# Altium PCB High_v4.PcbDoc
Units mm, origin at the board's own origin, x right, y up, seen from the top; angles counter-clockwise.
Board outline 56.79 x 56.79 mm, 2 copper layers (Top Layer, Bottom Layer); 36 components, 47 nets, 132 pads, 28 vias.
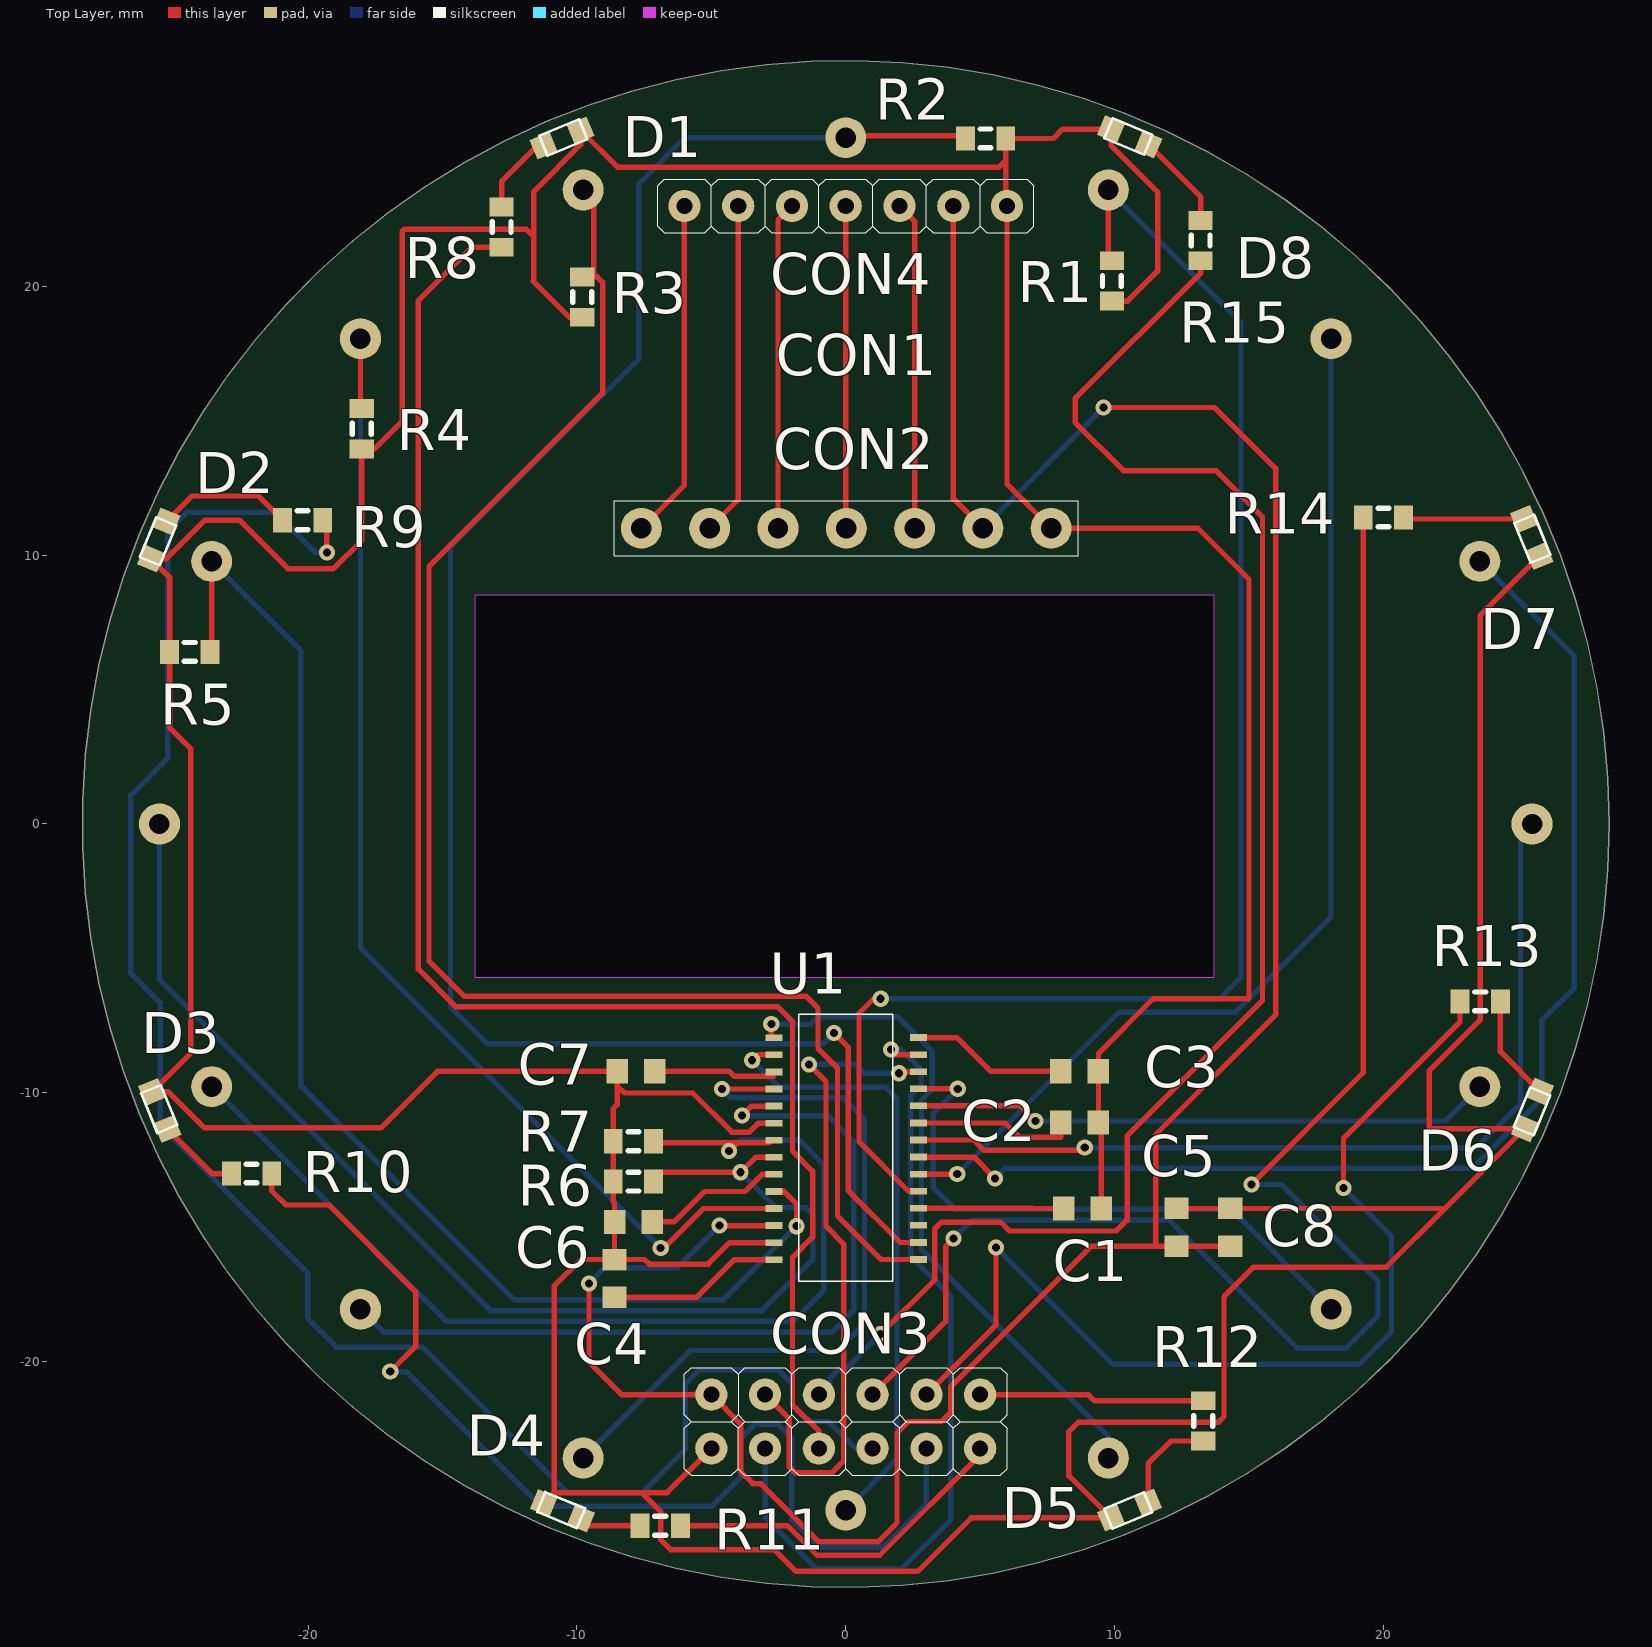
[diagram p0: Top Layer view]
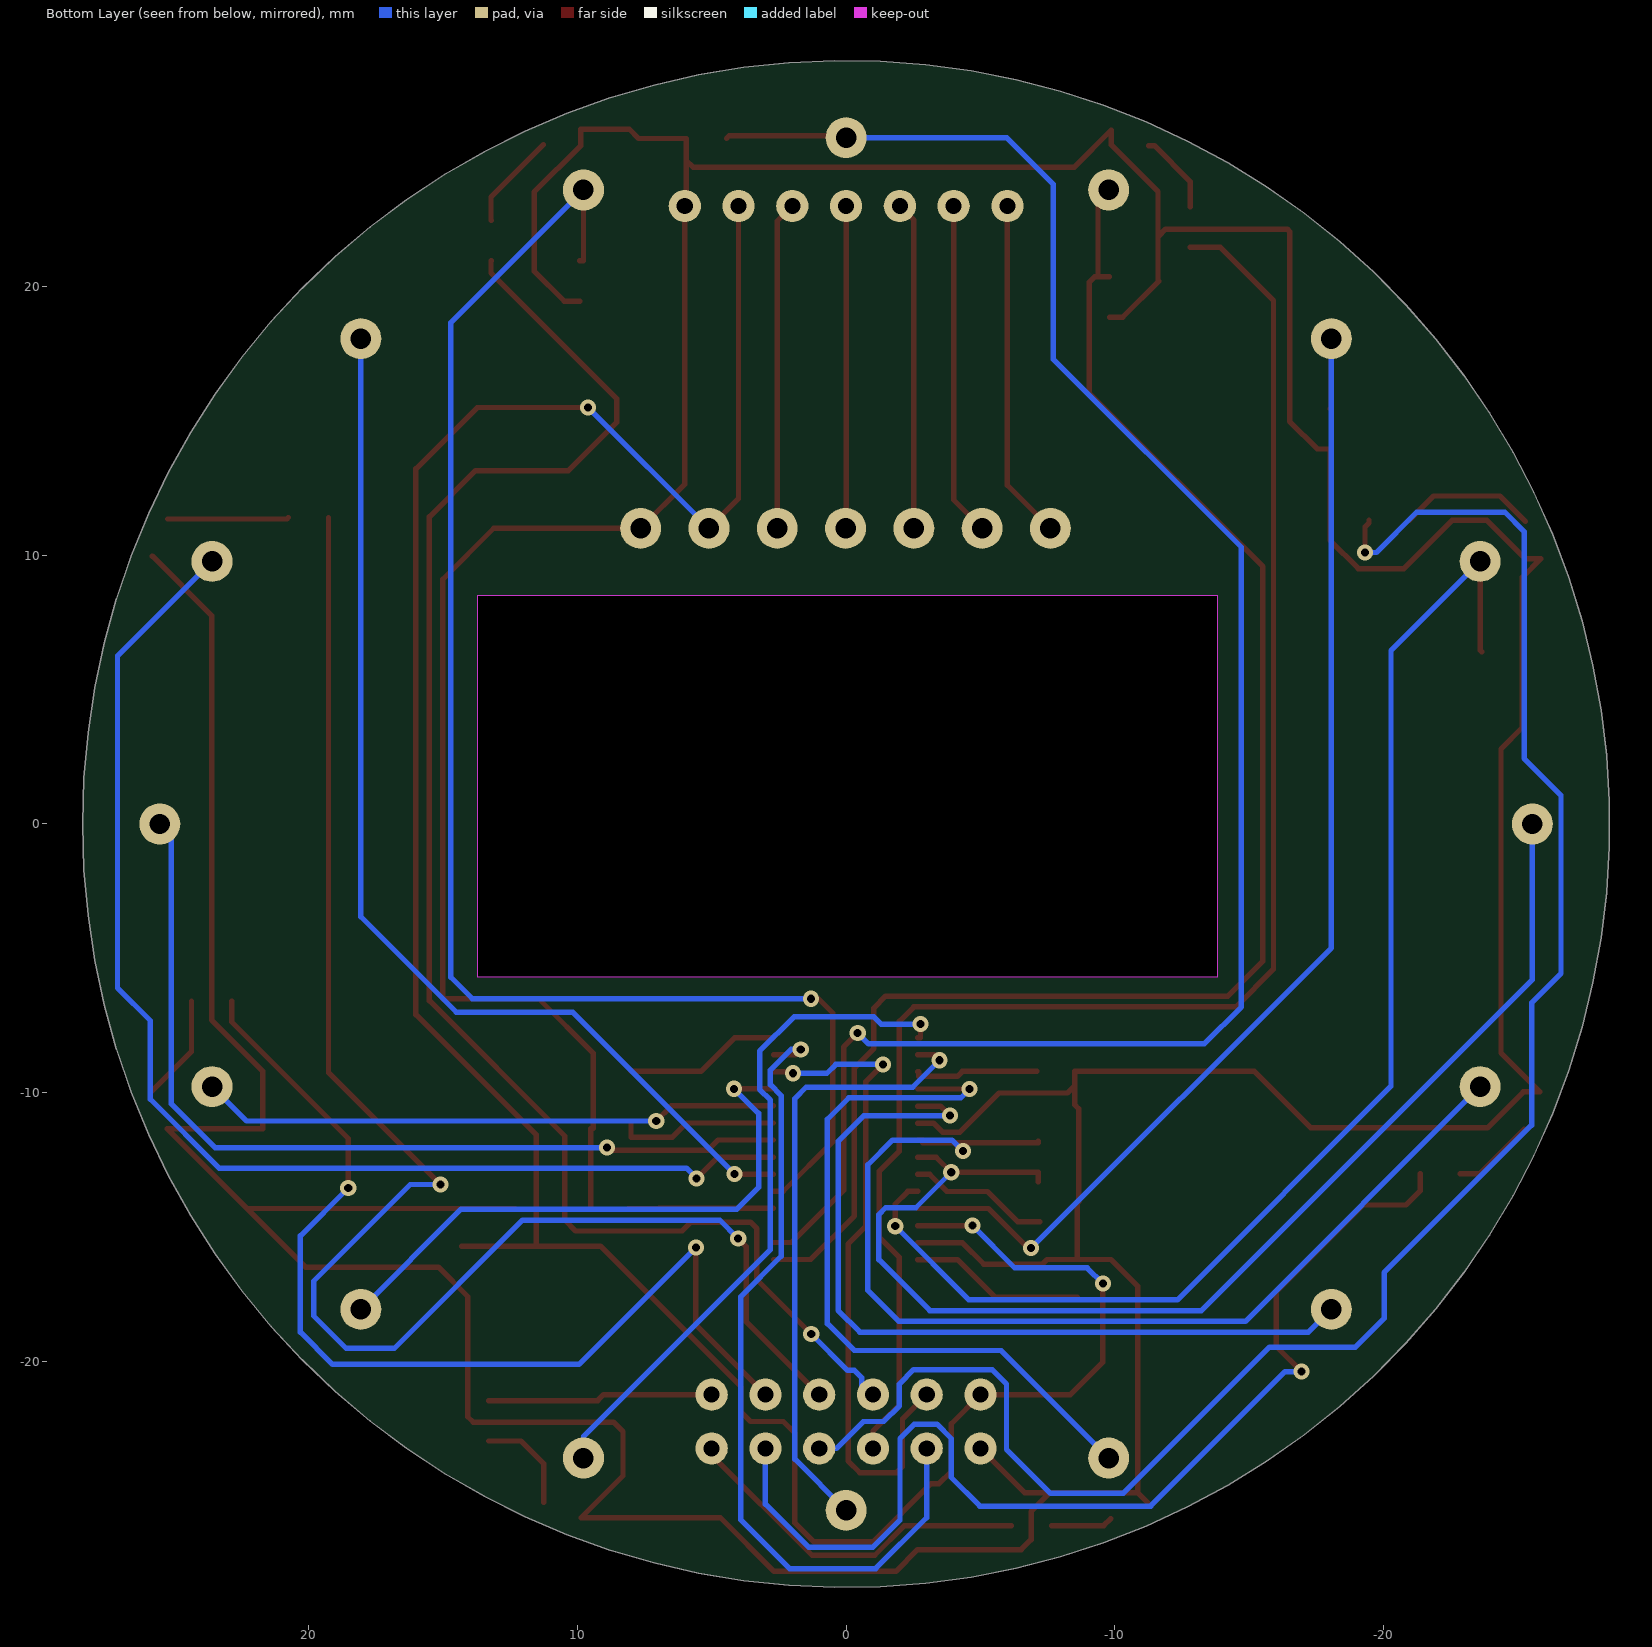
[diagram p1: Bottom Layer view, seen from below]

## Layer stack, top to bottom
Top Solder: solder mask 0.0102, Solder Resist, Dk 3.5
Top Layer: signal copper 0.0356
Dielectric 1: dielectric 0.32, FR-4, Dk 4.8
Bottom Layer: signal copper 0.0356
Bottom Solder: solder mask 0.0102, Solder Resist, Dk 3.5

## Board outline
28.4,0 28.349,1.698 28.197,3.391 27.944,5.071 27.59,6.733 27.138,8.371 26.589,9.979 25.945,11.551 25.207,13.082 24.38,14.566 23.465,15.998 22.466,17.373 21.387,18.685 20.231,19.931 19.003,21.105 17.707,22.204 16.348,23.223 14.929,24.159 13.458,25.009 11.938,25.769 10.376,26.437 8.776,27.01 7.145,27.486 5.488,27.865 3.812,28.143 2.122,28.321 0.425,28.397 -1.274,28.371 -2.969,28.244 -4.652,28.016 -6.32,27.688 -7.964,27.26 -9.58,26.735 -11.162,26.115 -12.704,25.4 -14.2,24.595 -15.645,23.702 -17.035,22.724 -18.363,21.664 -19.626,20.527 -20.819,19.317 -21.937,18.037 -22.976,16.693 -23.933,15.289 -24.805,13.83 -25.588,12.322 -26.279,10.77 -26.876,9.179 -27.377,7.555 -27.779,5.905 -28.083,4.233 -28.286,2.546 -28.387,0.85 -28.387,-0.85 -28.286,-2.546 -28.083,-4.233 -27.779,-5.905 -27.377,-7.555 -26.876,-9.179 -26.279,-10.77 -25.588,-12.322 -24.805,-13.83 -23.933,-15.289 -22.976,-16.693 -21.937,-18.037 -20.819,-19.317 -19.626,-20.527 -18.363,-21.664 -17.035,-22.724 -15.645,-23.702 -14.2,-24.595 -12.704,-25.4 -11.162,-26.115 -9.58,-26.735 -7.964,-27.26 -6.32,-27.688 -4.652,-28.016 -2.969,-28.244 -1.274,-28.371 0.425,-28.397 2.122,-28.321 3.812,-28.143 5.488,-27.865 7.145,-27.487 8.776,-27.01 10.376,-26.437 11.938,-25.769 13.458,-25.009 14.929,-24.159 16.348,-23.223 17.707,-22.204 19.003,-21.105 20.231,-19.931 21.387,-18.685 22.466,-17.373 23.465,-15.998 24.38,-14.566 25.207,-13.082 25.945,-11.551 26.589,-9.979 27.138,-8.371 27.59,-6.733 27.944,-5.071 28.197,-3.391 28.349,-1.698
cut-out: -13.8,8.5 -13.8,-5.7 13.7,-5.7 13.7,8.5

## Design rules (kind name [scope] priority, off if disabled: settings)
Clearance [All] p1: gap=0.2
PolygonConnect [All] p1: connectstyle=Relief reliefconductorwidth=0.254 reliefentries=4 polygonreliefangle="90 Angle" airgapwidth=0.254
RoutingVias [All] p1: holewidth=0.3 width=0.6 viastyle="Through Hole" minholewidth=0.3 minwidth=0.6 maxholewidth=0.711 maxwidth=1.27
SolderMaskExpansion [All] p1: expansion=0.102
Width [All] p1: maxlimit=0.254 minlimit=0.2 preferedwidth=0.2
29 further rules are at their usual default settings.

## Components (designator, comment, footprint, x,y, rotation, side; value= is the part's Value field where it differs from the comment)
C1 "Cap Semi" 1608[0603] 8.8,-14.3 r180 top
C2 "Cap Semi" 1608[0603] 8.7,-11.1 r180 top
C3 "Cap Semi" 1608[0603] 8.7,-9.2 r180 top
C4 "Cap Semi" 1608[0603] -8.6,-16.9 r90 top
C5 "Cap Semi" 1608[0603] 12.3,-15 r270 top
C6 "Cap Semi" 1608[0603] -7.9,-14.8 r0 top
C7 "Cap Semi" 1608[0603] -7.8,-9.2 r0 top
C8 "Cap Semi" 1608[0603] 14.3,-15 r270 top
CON1 "RoundSensorCon" RoundSensorCon 0,0 r0 top
CON2 "OLED" OLED -7.6,11 r0 top
CON3 "PIPE" PIPE_SMALL 0,-22.225 r0 top
CON4 "OLED" OLED_SNMALL 0,22.987 r0 top
D1 "LED2" LED0603 -11.4,25.6 r22.5 top
D2 "LED2" LED0603 -24.9,11.1 r247.5 top
D3 "LED2" LED0603 -25.6,-11.5 r112.5 top
D4 "LED2" LED0603 -10,-26.2 r157.5 top
D5 "LED2" LED0603 11.4,-25.6 r202.5 top
D6 "LED2" LED0603 26.2,-10.1 r247.5 top
D7 "LED2" LED0603 25.6,11.5 r292.5 top
D8 "LED2" LED0603 11.1,24.9 r157.5 top
R1 "Res3" J1-0603 9.9,20.2 r90 top
R2 "Res3" J1-0603 5.2,25.5 r180 top
R3 "Res3" J1-0603 -9.8,19.6 r90 top
R4 "Res3" J1-0603 -18,14.7 r90 top
R5 "Res3" J1-0603 -24.4,6.4 r0 top
R6 "Res3" J1-0603 -7.9,-13.3 r0 top
R7 "Res3" J1-0603 -7.9,-11.8 r0 top
R8 "Res3" J1-0603 -12.8,22.2 r90 top
R9 "Res3" J1-0603 -20.2,11.3 r180 top
R10 "Res3" J1-0603 -22.1,-13 r180 top
R11 "Res3" J1-0603 -6.9,-26.1 r180 top
R12 "Res3" J1-0603 13.3,-22.2 r270 top
R13 "Res3" J1-0603 23.6,-6.6 r0 top
R14 "Res3" J1-0603 20,11.4 r0 top
R15 "Res3" J1-0603 13.2,21.7 r90 top
U1 "TTP229-BSF" SSOP-28 2.7,-16.2 r180 top

## Footprints (in the part's own frame and the unit in brackets; to place one, negate y for a bottom-side part, rotate by r counter-clockwise, add the part's x,y. Pads: shape width x height; smd on the part's side, far side on the other; paste and mask are expansions set on the pad)
1608[0603] [mm] "Chip Capacitor, Body 1.6x0.8mm, IPC High Density"
  rect 0.8x0.9 smd: 1(-0.7,0) 2(0.7,0)
  body extent -0.87,-0.48 0.87,0.48, height 1.3
J1-0603 [mm] "Chip Resistor, Body 1.6x0.8mm, IPC High Density"
  rect 0.7x0.9 smd: 1(-0.75,0) 2(0.75,0)
  silkscreen extent -0.2,-0.35 0.2,0.35, body extent -0.85,-0.48 0.85,0.48, height 0.9
LED0603 [mm]
  rect 0.8x0.8 smd: 1(0,-0.4) 2(1.5,-0.4)
  silkscreen extent 0,-0.8 1.6,0
OLED [mil]
  round 60 hole 30: 1(0,0) 2(100,0) 3(200,0) 4(300,0) 5(400,0) 6(500,0) 7(600,0)
  silkscreen extent -40,-40 640,40
OLED_SNMALL [mm]
  round 1.2 hole 0.6: 1(-6,0) 2(-4,0) 3(-2,0) 4(0,0) 5(2,0) 6(4,0) 7(6,0)
  silkscreen extent -7,-1 7,1
PIPE_SMALL [mm]
  round 1.2 hole 0.6: 1(-5,-1) 2(-3,-1) 3(-1,-1) 4(1,-1) 5(3,-1) 6(5,-1) 7(5,1) 8(3,1) 9(1,1) 10(-1,1) 11(-3,1) 12(-5,1)
  silkscreen extent -6,-2 6,2
RoundSensorCon [mil]
  round 60 hole 30: 1(710.64,710.64) 2(384.6,928.5) 3(0,1005) 4(-384.6,928.5) 5(-710.64,710.64) 6(-928.5,384.6) 7(-1005,0) 8(-928.5,-384.6) 9(-710.64,-710.64) 10(-384.6,-928.5) 11(0,-1005) 12(384.6,-928.5) 13(710.64,-710.64) 14(928.5,-384.6) 15(1005,0) 16(928.5,384.6)
  Top Layer lines w0.39: -384.6,928.5 -368.99,922.03
SSOP-28 [mm]
  rect 0.635x0.25 smd: 1(0,0) 2(0,-0.635) 3(0,-1.27) 4(0,-1.905) 5(0,-2.54) 6(0,-3.175) 7(0,-3.81) 8(0,-4.445) 9(0,-5.08) 10(0,-5.715) 11(0,-6.35) 12(0,-6.985) 13(0,-7.62) 14(0,-8.255) 15(5.365,-8.248) 16(5.365,-7.613) 17(5.365,-6.978) 18(5.365,-6.343) 19(5.365,-5.708) 20(5.365,-5.073) 21(5.365,-4.438) 22(5.365,-3.803) 23(5.365,-3.168) 24(5.365,-2.533) 25(5.365,-1.898) 26(5.365,-1.263) 27(5.365,-0.628) 28(5.365,0.007)
  silkscreen extent 0.95,-9.12 4.44,0.82

## Part data
C1 C2 C3 C4 C5 C6 C7 C8: "Capacitor (Semiconductor SIM Model)"
D1 D2 D3 D4 D5 D6 D7 D8: "Typical RED, GREEN, YELLOW, AMBER GaAs LED"
R1 R2 R3 R4 R5 R6 R7 R8 R9 R10 R11 R12 R13 R14 R15: "Resistor"

## Via types
v1: diameter 0.6, hole 0.3, Top Layer to Bottom Layer, 28 vias

## Nets (pads, with @x,y where several pads share a name; then routed paths per layer and width w, separated by ;. In a path a pad name is that pad's centre, name@x,y a point inside that pad or via, vN(x,y) a via of type N, cw(c..) or ccw(c..) an arc to the next point about the centre after c; other vN are vias at no path point)
GND: C1.1 C2.1 C3.1 C4.2 C5.1 C6.1 C7.1 C8.1 CON2.7 CON3.1 CON4.7 D1.2 D2.2 D3.2 D4.2 D5.2 D6.2 D7.2 D8.2 R1.1 R2.1 R3.1 R4.1 R5.1 R6.1 R7.1 U1.20 U1.27 | length 277.7
  Top Layer w0.2: -11.633,20.193 -10.29,18.85 R3.1 ; -11.633,21.869 -11.887,22.123 -16.414,22.123 -16.5,22.037 -16.5,14.979 -17.529,13.95 R4.1 -18,10.551 -19.051,9.5 -20.752,9.5 -22.552,11.3 -23.828,11.3 -25.261,9.867 D2.2 -25.15,9.174 R5.1 -25.15,3.581 -24.359,2.79 -24.359,-8.515 D3.2 -25.192,-9.961 -23.854,-11.3 -17.289,-11.3 -15.189,-9.2 C7.1 -8.5,-9.737 ; -11.6,20.16 -11.6,23.528 -9.861,25.267 D1.2 -8.491,24.435 5.696,24.435 5.95,24.689 ; D4.2 -10.846,-24.869 ; -7.592,-24.869 -6.883,-25.578 -6.883,-26.619 -6.514,-26.989 -2.662,-26.989 -1.851,-27.8 2.678,-27.8 4.674,-25.804 D5.2 8.3,-24.243 8.3,-22.6 8.65,-22.25 13.868,-22.25 14.072,-22.047 14.072,-17.577 15.164,-16.485 20.105,-16.485 22.289,-14.3 ; CON3.1 -6.644,-24.869 -10.846,-24.869 ; U1.27 -4.318,-15.572 -5.12,-16.373 -7.308,-16.373 -7.481,-16.2 C4.2 ; U1.20 -3.252,-11.127 -3.585,-11.46 -4.239,-11.46 -5.691,-10.008 -8.23,-10.008 -8.5,-9.737 ; C1.1 9.5,-11.325 9.4,-11.325 C2.1 C3.1 9.4,-8.532 11.432,-6.5 15,-6.5 15,9.105 13.105,11 CON2.7 6,12.64 CON4.7 5.95,23.037 5.95,24.689 ; R1.1 10.484,19.45 11.6,20.566 11.6,23.5 9.867,25.233 D8.2 8.065,25.844 7.722,25.5 R2.1 5.95,24.689 ; C5.1 C8.1 22.289,-14.3 ; D7.2 23.6,7.757 23.6,-7.286 21.7,-9.186 21.7,-11.333 D6.2 22.289,-14.3 ; -10.846,-24.869 -10.846,-17.191 -9.855,-16.2 C4.2 ; C4.2 C6.1 -8.6,-14.097 -8.65,-14.047 R6.1 -8.65,-12.573 R7.1 -8.65,-10.592 -8.5,-10.442 -8.5,-9.737
NetC1_2: C1.2 U1.4 | length 5.4
  Top Layer w0.2: U1.4 6.943,-14.295 6.948,-14.3 C1.2
NetC2_2: C2.2 U1.9 | length 6.1
  Top Layer w0.2: U1.9 5.932,-11.12 6.461,-11.649 8,-11.649 C2.2
NetC3_2: C3.2 U1.14 | length 5.8
  Top Layer w0.2: U1.14 4.14,-7.945 5.395,-9.2 C3.2
NetC4_1: C4.1 U1.28 | length 6.5
  Top Layer w0.2: C4.1 -5.535,-17.6 -4.142,-16.207 U1.28
NetC6_2: C6.2 U1.23 | length 5.3
  Top Layer w0.2: C6.2 -6.387,-14.8 -5.255,-13.669 -3.749,-13.669 -3.112,-13.032 U1.23
NetC7_2: C7.2 U1.17 | length 4.7
  Top Layer w0.2: C7.2 -4.328,-9.2 -4.139,-9.388 -2.697,-9.388 -2.697,-9.222 U1.17
NetCON1_1: CON1.1 U1.6 | length 40.8
  Top Layer w0.2: U1.6 v1(4.148,-13.025)
  Bottom Layer w0.2: v1(4.148,-13.025) 10.173,-7 14.5,-7 18.05,-3.45 CON1.1
NetCON1_2: CON1.2 R1.2 U1.5 | length 56.4
  Top Layer w0.2: v1@1.066,-6.5 1.031,-6.5 0.492,-7.039 0.492,-11.815 2.337,-13.66 U1.5 ; CON1.2 9.769,20.95 R1.2
  Bottom Layer w0.2: v1(1.3,-6.5) 13.9,-6.5 14.7,-5.7 14.7,18.653 CON1.2
NetCON1_3: CON1.3 R2.2 U1.2 | length 70.9
  Top Layer w0.2: v1(-0.432,-7.772) 0.092,-8.296 0.092,-13.63 2.027,-15.565 U1.2 ; CON1.3 0.073,25.6 4.35,25.6 R2.2
  Bottom Layer w0.2: v1(-0.432,-7.772) -0.838,-8.179 -13.321,-8.179 -14.7,-6.8 -14.7,10.294 -7.7,17.294 -7.7,23.8 -5.973,25.527 CON1.3
NetCON1_4: CON1.4 R3.2 U1.1 | length 58.7
  Top Layer w0.2: R3.2 R3.2@-9.372,20.35 ; CON1.4@-9.372,23.42 R3.2@-9.372,20.35 ; U1.1 1.316,-16.2 -0.308,-14.577 -0.308,-9.067 -1.032,-8.343 -1.032,-6.842 -1.474,-6.4 -14.2,-6.4 -15.5,-5.1 -15.5,9.57 -9.042,16.027 -9.042,20.147 -9.246,20.35 R3.2@-9.372,20.35
NetCON1_5: CON1.5 R4.2 U1.25 | length 45.9
  Top Layer w0.2: CON1.5 -18.05,15.5 R4.2 ; v1(-6.883,-15.773) -6.767,-15.773 -5.296,-14.302 U1.25
  Bottom Layer w0.2: CON1.5 -18.05,-4.606 v1(-6.883,-15.773)
NetCON1_6: CON1.6 R5.2 U1.24 | length 49
  Top Layer w0.2: R5.2 -23.584,6.466 CON1.6 ; U1.24 -2.3,-13.667 -1.829,-14.138 v1(-1.829,-14.961)
  Bottom Layer w0.2: CON1.6 -20.269,6.454 -20.269,-9.754 -12.323,-17.7 -4.568,-17.7 v1(-1.829,-14.961)
NetCON1_7: CON1.7 R6.2 U1.22 | length 46.1
  Top Layer w0.2: R6.2 -7.15,-12.954 v1(-3.912,-12.954) -3.355,-12.397 U1.22
  Bottom Layer w0.2: CON1.7 -25.527,-5.791 -13.218,-18.1 -3.114,-18.1 -1.219,-16.205 -1.219,-14.529 -1.473,-14.275 -2.591,-14.275 v1(-3.912,-12.954)
NetCON1_8: CON1.8 R7.2 U1.21 | length 40.7
  Top Layer w0.2: R7.2 -7.15,-11.86 -4.037,-11.86 ; v1(-4.343,-12.167) -4.037,-11.86 ; U1.21 -2.852,-11.762 -2.852,-11.86 -4.037,-11.86
  Bottom Layer w0.2: CON1.8 -14.853,-18.5 -1.965,-18.5 -0.813,-17.348 -0.813,-12.675 -1.727,-11.76 -3.937,-11.76 v1(-4.343,-12.167)
NetCON1_9: CON1.9 U1.19 | length 31.2
  Top Layer w0.2: v1(-3.861,-10.846) -3.507,-10.492 U1.19
  Bottom Layer w0.2: CON1.9 -17.201,-18.9 -0.51,-18.9 0.295,-18.094 0.295,-11.802 -0.66,-10.846 v1(-3.861,-10.846)
NetCON1_10: CON1.10 U1.18 | length 27.8
  Top Layer w0.2: v1(-4.596,-9.857) U1.18
  Bottom Layer w0.2: CON1.10 -5.768,-19.583 -0.305,-19.583 0.695,-18.583 0.695,-10.982 -0.099,-10.188 -4.265,-10.188 v1(-4.596,-9.857)
NetCON1_11: CON1.11 U1.16 | length 23
  Top Layer w0.2: v1(-3.48,-8.788) -3.278,-8.587 U1.16
  Bottom Layer w0.2: v1(-3.48,-8.788) -2.48,-9.788 1.483,-9.788 1.905,-10.211 1.905,-23.622 CON1.11
NetCON1_12: CON1.12 U1.15 | length 25.4
  Top Layer w0.2: v1(-2.769,-7.442) -2.769,-7.952 U1.15
  Bottom Layer w0.2: v1(-2.769,-7.442) -1.302,-7.442 -1.032,-7.172 1.939,-7.172 3.216,-8.449 3.216,-9.874 2.819,-10.27 2.819,-15.83 9.769,-22.78 CON1.12
NetCON1_13: CON1.13 U1.11 | length 22.2
  Top Layer w0.2: U1.11 v1(4.166,-9.85)
  Bottom Layer w0.2: v1(4.166,-9.85) 3.251,-10.764 3.251,-13.513 4.064,-14.326 14.326,-14.326 CON1.13
NetCON1_14: CON1.14 U1.10 | length 21.6
  Top Layer w0.2: U1.10 6.497,-10.485 v1(7.061,-11.049)
  Bottom Layer w0.2: v1(7.061,-11.049) 22.304,-11.049 CON1.14
NetCON1_15: CON1.15 U1.8 | length 33.9
  Top Layer w0.2: U1.8 4.762,-11.755 5.148,-12.141 8.788,-12.141 v1(8.89,-12.04)
  Bottom Layer w0.2: v1(8.89,-12.04) 23.47,-12.04 25.1,-10.409 25.1,-0.427 CON1.15
NetCON1_16: CON1.16 U1.7 | length 46.7
  Top Layer w0.2: U1.7 4.766,-12.39 v1(5.558,-13.183)
  Bottom Layer w0.2: v1(5.558,-13.183) 5.941,-12.8 23.319,-12.8 25.883,-10.236 25.883,-7.315 27.1,-6.098 27.1,6.253 CON1.16
NetCON2_1: CON2.1 CON4.1 | length 12.6
  Top Layer w0.2: CON2.1 -6,12.6 CON4.1
NetCON2_2: CON2.2 CON4.2 | length 12.4
  Top Layer w0.2: CON2.2 -4,12.06 CON4.2
NetCON2_3: CON2.3 CON4.3 | length 12.2
  Top Layer w0.2: CON2.3 -2.52,22.467 CON4.3
NetCON2_4: CON2.4 CON4.4 | length 12
  Top Layer w0.2: CON4.4 0,11.02 CON2.4
NetCON2_5: CON2.5 CON4.5 | length 12.2
  Top Layer w0.2: CON4.5 2.56,22.427 CON2.5
NetCON3_2: CON3.2 U1.13 | length 31.1
  Top Layer w0.2: v1(1.686,-8.382) 1.884,-8.58 U1.13
  Bottom Layer w0.2: CON3.2 -3,-25.8 -1.1,-27.7 2.1,-27.7 3.912,-25.888 3.912,-17.577 2.413,-16.078 2.413,-10.1 2.816,-9.697 2.816,-9.149 2.049,-8.382 v1(1.686,-8.382)
NetCON3_3: CON3.3 R8.1 | length 60.4
  Top Layer w0.2: R8.1 -13.919,21.45 -15.9,19.469 -15.9,-5.4 -14.5,-6.8 -2.522,-6.8 -1.981,-7.341 -1.981,-12.168 -1.229,-12.92 -1.229,-15.369 -1.981,-16.121 -1.981,-21.603 -1,-22.584 CON3.3
NetCON3_4: CON3.4 R9.1 | length 69.4
  Top Layer w0.2: R9.1 -19.45,11.201 -19.3,11.051 v1(-19.3,10.1)
  Bottom Layer w0.2: v1(-19.3,10.1) -19.727,10.1 -21.227,11.6 -24.5,11.6 -25.222,10.878 -25.222,2.438 -26.594,1.067 -26.594,-5.563 -25.502,-6.655 -25.502,-11.201 -20.015,-16.688 -20.015,-18.39 -18.948,-19.456 -15.748,-19.456 -10.304,-24.9 -7.603,-24.9 -5.969,-23.266 -5.969,-20.828 -5.436,-20.295 -2.515,-20.295 -1.981,-20.828 -1.981,-21.641 -1.397,-22.225 -0.644,-22.225 0.356,-23.225 CON3.4
NetCON3_5: CON3.5 R10.1 | length 41.5
  Top Layer w0.2: R10.1 -21.35,-13.651 -20.828,-14.173 -19.227,-14.173 -16,-17.4 -16,-19.429 v1(-16.942,-20.371)
  Bottom Layer w0.2: v1(-16.942,-20.371) -16.332,-20.371 -11.328,-25.375 -4.978,-25.375 -3.912,-24.308 -3.912,-22.86 -3.377,-22.325 -2.54,-22.325 -2.007,-22.858 -2.007,-25.893 -1,-26.9 1.4,-26.9 3,-25.3 CON3.5
NetCON3_6: CON3.6 R11.1 | length 13.4
  Top Layer w0.2: R11.1 -2.166,-26.1 -1.066,-27.2 1.266,-27.2 5,-23.466 CON3.6
NetCON3_7: CON3.7 R12.1 | length 8.4
  Top Layer w0.2: CON3.7 9.017,-21.225 9.242,-21.45 R12.1
NetCON3_8: CON3.8 R13.1 | length 38.4
  Top Layer w0.2: CON3.8 5.588,-18.637 v1(5.588,-15.748) ; v1(18.517,-13.538) 18.517,-11.699 22.85,-7.366 R13.1
  Bottom Layer w0.2: v1(5.588,-15.748) 9.94,-20.1 19.1,-20.1 20.3,-18.9 20.3,-18.366 20.3,-15.322 v1(18.517,-13.538)
NetCON3_9: CON3.9 R14.1 | length 59.6
  Top Layer w0.2: CON3.9 3.718,-18.507 3.718,-15.713 v1(4.013,-15.418) ; v1(15.088,-13.411) 19.25,-9.249 R14.1
  Bottom Layer w0.2: v1(4.013,-15.418) 4.699,-14.732 12.032,-14.732 16.8,-19.5 18.6,-19.5 19.8,-18.3 19.8,-17 16.211,-13.411 v1(15.088,-13.411)
NetCON3_10: CON3.10 R15.1 | length 60.5
  Top Layer w0.2: v1(1.295,-18.974) 3.318,-16.952 3.318,-15.047 3.556,-14.808 5.766,-14.808 6.096,-15.138 10.058,-15.138 10.465,-14.732 10.465,-11.608 15.5,-6.573 15.5,11.424 13.779,13.145 10.324,13.145 8.534,14.935 8.534,15.824 13.208,20.498 13.208,20.95 R15.1
  Bottom Layer w0.2: CON3.10 -0.584,-21.225 -0.584,-20.599 -0.305,-20.32 -0.051,-20.32 v1(1.295,-18.974)
NetCON3_11: CON3.11 U1.12 | length 24.9
  Top Layer w0.2: CON3.11 -2.1,-22.125 -2.1,-23.905 -1.88,-24.125 -0.508,-24.125 -0.076,-23.693 -0.076,-15.621 -0.737,-14.961 -0.737,-9.576 v1(-1.372,-8.941) ; v1(1.981,-9.271) 2.037,-9.215 U1.12
  Bottom Layer w0.2: v1(-1.372,-8.941) 0.381,-8.941 0.711,-9.271 v1(1.981,-9.271)
NetD1_1: D1.1 R8.2 | length 3.1
  Top Layer w0.2: R8.2 -12.8,23.9 -11.47,25.23 D1.1
NetD2_1: D2.1 R9.2 | length 5.1
  Top Layer w0.2: D2.1 -24.323,12.2 -21.85,12.2 R9.2
NetD3_1: D3.1 R10.2 | length 3.1
  Top Layer w0.2: D3.1 -23.573,-13.005 -22.85,-13.005 R10.2
NetD4_1: D4.1 R11.2 | length 2.3
  Top Layer w0.2: D4.1 -9.577,-26.1 R11.2
NetD5_1: D5.1 R12.2 | length 3.8
  Top Layer w0.2: D5.1 11.247,-23.794 12.09,-22.95 R12.2
NetD6_1: D6.1 R13.2 | length 4
  Top Layer w0.2: R13.2 24.35,-8.467 D6.1
NetD7_1: D7.1 R14.2 | length 4.5
  Top Layer w0.2: R14.2 20.803,11.347 D7.1
NetD8_1: D8.1 R15.2 | length 3.6
  Top Layer w0.2: D8.1 13.208,23.315 13.208,22.45 R15.2
VCC: C5.2 C8.2 CON2.6 CON3.12 CON4.6 U1.26 | length 102.3
  Top Layer w0.2: v1(-9.55,-17.094) -9.55,-20.015 -8.341,-21.225 CON3.12 -3.912,-22.313 -3.912,-24.079 -3.454,-24.536 -3.164,-24.536 -1,-26.7 1.2,-26.7 1.905,-25.995 1.905,-22.657 2.337,-22.225 3.556,-22.225 3.912,-21.869 3.912,-20.93 9.141,-15.7 11.532,-15.7 ; v1(-4.701,-14.937) U1.26 ; CON4.6 4,12.1 CON2.6 ; v1(9.594,15.494) 13.716,15.494 16,13.21 16,-7.089 11.532,-11.557 11.532,-15.7 ; C8.2 C5.2 11.532,-15.7
  Bottom Layer w0.2: v1(-9.55,-17.094) -8.966,-16.51 -6.274,-16.51 v1(-4.701,-14.937) ; CON2.6 v1(9.594,15.494)
pads on no net: U1.3

## Silkscreen, mask and mechanical layers (free items; w line width, h text height)
Mechanical 1:
  circle w0.254: c0,0 r28.4
  lines w0.1: -13.8,-5.7 -13.8,8.5 13.7,8.5 13.7,-5.7 -13.8,-5.7